# EAGLE board Bi Directional Visitor Counter (EAGLE 6.1)
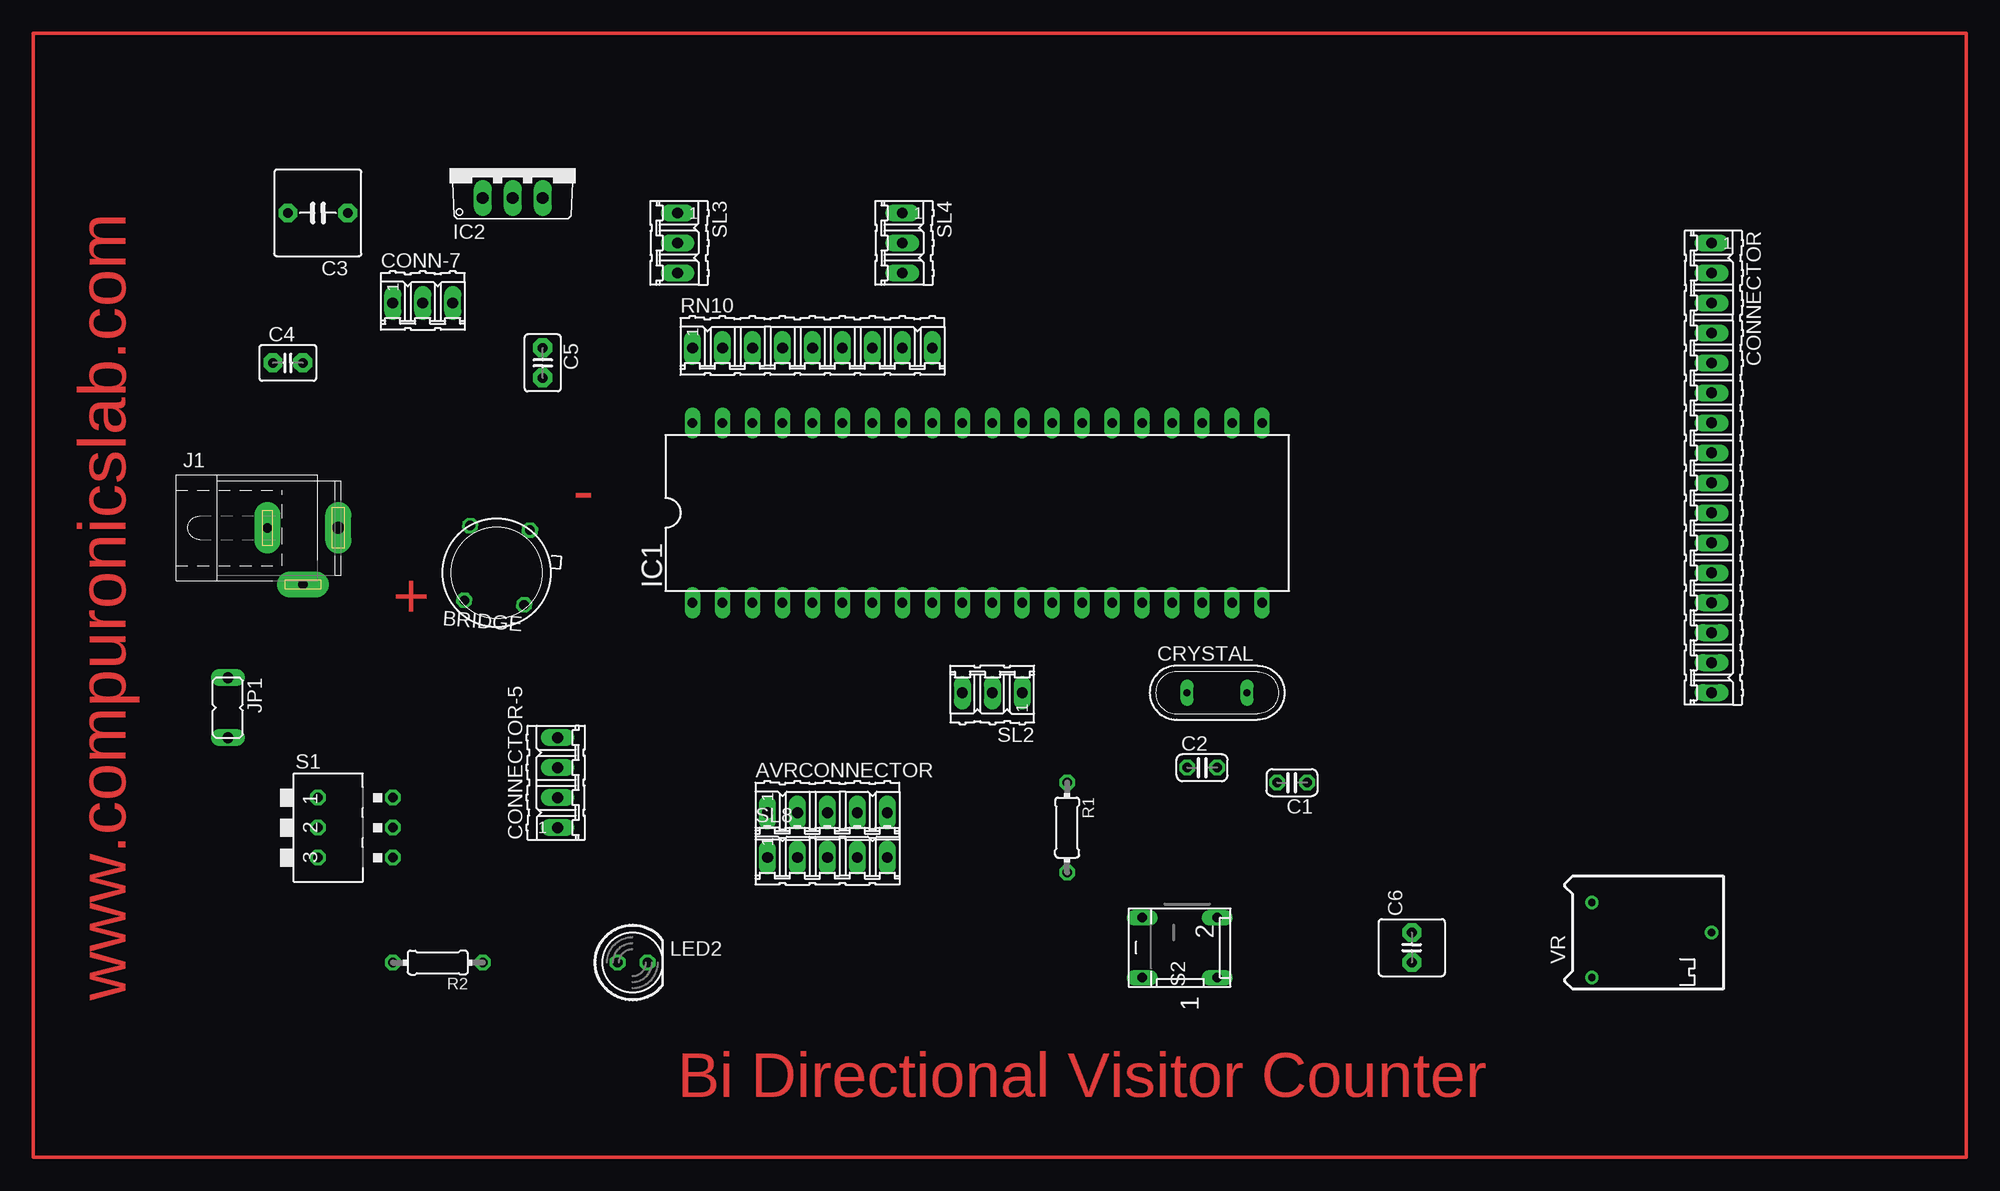
[diagram p0: board, top side]
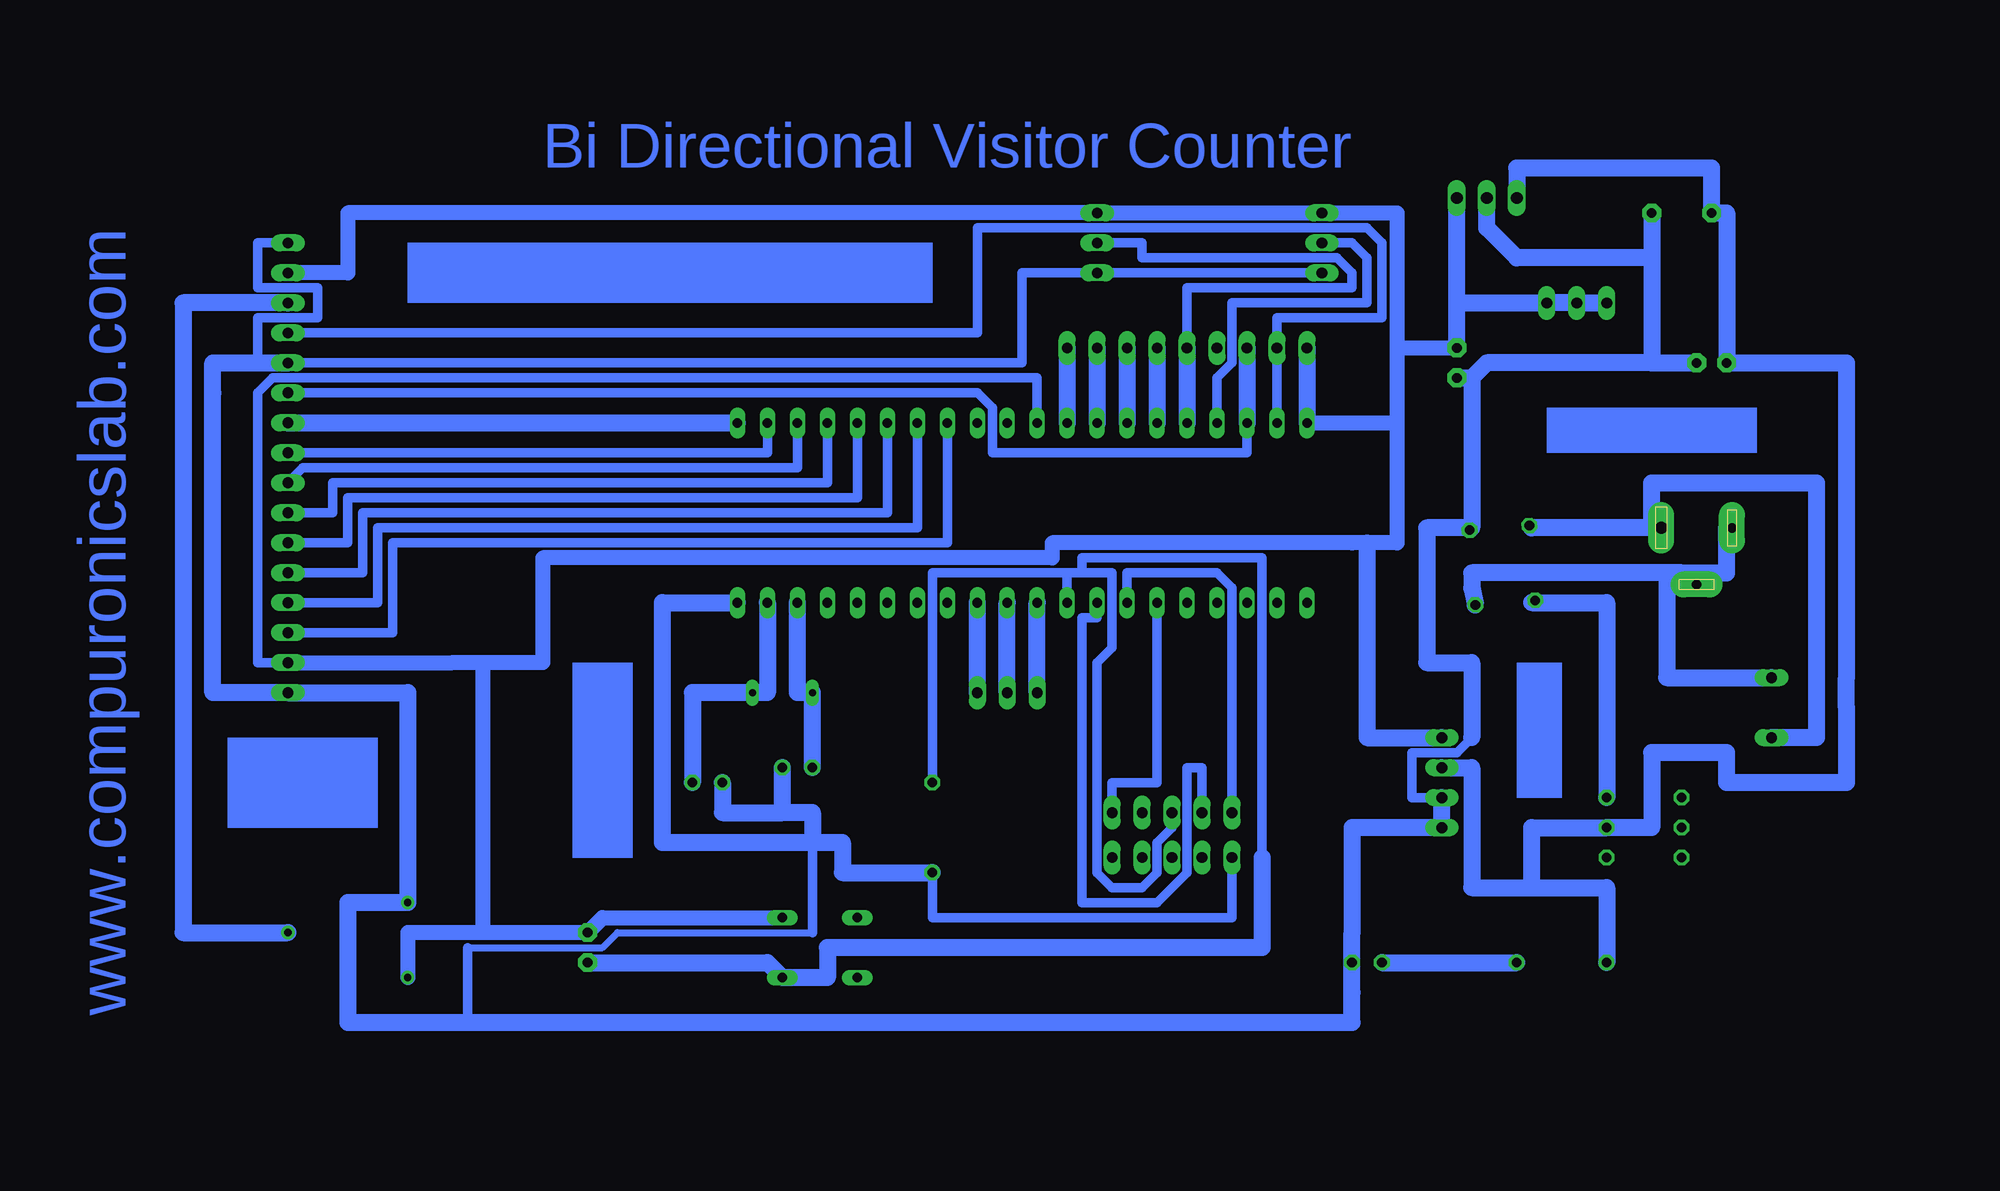
[diagram p1: board, bottom side, seen from below]

No outline drawn. Coordinates in mm, seen from the top.
Copper layers (1*16): Top 0.035mm / dielectric 1.5mm / Bottom 0.035mm
Design rules: minimum track width 20mil, minimum drill 24mil, track to track 20mil, track to pad 8mil, pad to pad 8mil, via to via 8mil, smd to smd 8mil, copper to edge 20mil, drill to drill 8mil, minimum pad ring 10mil, minimum via ring 8mil, stop-mask expansion 8mil, vias tented up to drill 0mil, thermal gap 20mil

## Footprints (pad centres in the part's own frame; a part is rotated, then mirrored left to right if it is on the bottom)
05P = drill 0.914 long: 1 -5.08,0; 2 -2.54,0; 3 0,0; 4 2.54,0; 5 5.08,0
TO39/4 = drill 0.813 octagon: 1 -2.54,-2.54; 2 2.54,-2.54; 3 2.54,3.81; 4 -2.54,3.81
C025-024X044 = drill 0.813 octagon: 1 -1.27,0; 2 1.27,0
C5B7.2 = drill 0.813 pad 1.6 octagon: 1 -2.54,0; 2 2.54,0
C2.5-3 = drill 0.813 pad 1.6 octagon: 1 -1.27,0; 2 1.27,0
C2.5-6 = drill 0.813 pad 1.6 octagon: 1 -1.27,0; 2 1.27,0
03P = drill 0.914 long: 1 -2.54,0; 2 0,0; 3 2.54,0
16P = drill 0.914 long: 1 -19.05,0; 2 -16.51,0; 3 -13.97,0; 4 -11.43,0; 5 -8.89,0; 6 -6.35,0; 7 -3.81,0; 8 -1.27,0; 9 1.27,0; 10 3.81,0; 11 6.35,0; 12 8.89,0; 13 11.43,0; 14 13.97,0; 15 16.51,0; 16 19.05,0
04P = drill 0.914 long: 1 -3.81,0; 2 -1.27,0; 3 1.27,0; 4 3.81,0
QS = drill 0.61 long: 1 -2.54,0; 2 2.54,0
DIL40 = drill 0.813 long: 1 -24.13,-7.62; 2 -21.59,-7.62; 3 -19.05,-7.62; 4 -16.51,-7.62; 5 -13.97,-7.62; 6 -11.43,-7.62; 7 -8.89,-7.62; 8 -6.35,-7.62; 9 -3.81,-7.62; 10 -1.27,-7.62; 11 1.27,-7.62; 12 3.81,-7.62; 13 6.35,-7.62; 14 8.89,-7.62; 15 11.43,-7.62; 16 13.97,-7.62; 17 16.51,-7.62; 18 19.05,-7.62; 19 21.59,-7.62; 20 24.13,-7.62; 21 24.13,7.62; 22 21.59,7.62; 23 19.05,7.62; 24 16.51,7.62; 25 13.97,7.62; 26 11.43,7.62; 27 8.89,7.62; 28 6.35,7.62; 29 3.81,7.62; 30 1.27,7.62; 31 -1.27,7.62; 32 -3.81,7.62; 33 -6.35,7.62; 34 -8.89,7.62; 35 -11.43,7.62; 36 -13.97,7.62; 37 -16.51,7.62; 38 -19.05,7.62; 39 -21.59,7.62; 40 -24.13,7.62
TO220V = drill 1.016 long: 1 -2.54,-2.54; 2 0,-2.54; 3 2.54,-2.54
SPC4077 = drill 0.8 pad 2.184 long: 1 -3,0; 2 0,-4.8 | drill 1 pad 2.184 long: 3 3,0
JP1 = drill 0.914 long: 1 0,-2.54; 2 0,2.54
LED5MM = drill 0.813 octagon: A -1.27,0; K 1.27,0
0204/7 = drill 0.813 octagon: 1 -3.81,0; 2 3.81,0
09P = drill 0.914 long: 1 -10.16,0; 2 -7.62,0; 3 -5.08,0; 4 -2.54,0; 5 0,0; 6 2.54,0; 7 5.08,0; 8 7.62,0; 9 10.16,0
DA-03 = drill 0.813 octagon: 1 -2.54,-5.08; 2 0,-5.08; 3 2.54,-5.08; 4 2.54,1.27; 5 0,1.27; 6 -2.54,1.27
DP-02 = drill 0.813 long: 1 -2.54,-2.54; 2 2.54,-2.54; 3 2.54,3.81; 4 -2.54,3.81
RTRIM64P = drill 0.61: 1 -2.54,-3.81; 2 7.62,0; 3 -2.54,2.54

## Placement (x,y rotation side)
AVRCONNECTOR  [05P]  40.64,20.32 0 top
BRIDGE  [TO39/4]  12.7,41.91 175.6 top
C1  33pf  [C025-024X044]  80.01,22.86 180 top
C2  33pf  [C025-024X044]  72.39,24.13 0 top
C3  470uf  [C5B7.2]  -2.54,71.12 180 top
C4  .01uf  [C2.5-3]  -5.08,58.42 0 top
C5  4.7uf  [C2.5-3]  16.51,58.42 270 top
C6  0.1uf  [C2.5-6]  90.17,8.89 90 top
CONN-7  3 pin  [03P]  6.35,63.5 0 top
CONNECTOR  LCD  [16P]  115.57,49.53 270 top
CONNECTOR-5  4 pin  [04P]  17.78,22.86 90 top
CRYSTAL  11.0592 mhz  [QS]  73.66,30.48 0 top
IC1  AT89S51  [DIL40]  53.34,45.72 0 top
IC2  7805TV  [TO220V]  13.97,74.93 0 top
J1  [SPC4077]  -3.81,44.45 0 top
JP1  TRANSFORMER  [JP1]  -10.16,29.21 180 top
LED2  5mm  [LED5MM]  24.13,7.62 0 top
R1  10k  [0204/7]  60.96,19.05 270 top
R2  560E  [0204/7]  7.62,7.62 180 top
RN10  10 k  [09P]  39.37,59.69 0 top
S1  ON/ OFF SWITCH  [DA-03]  2.54,19.05 270 top
S2  push switch  [DP-02]  71.12,8.89 90 top
SL2  3 pin  [03P]  54.61,30.48 180 top
SL3  ir module  [03P]  27.94,68.58 270 top
SL4  ir module  [03P]  46.99,68.58 270 top
SL8  [05P]  40.64,16.51 0 top
VR  10k  [RTRIM64P]  107.95,10.16 0 top

## Library data of the parts
AVRCONNECTOR CONN-7 CONNECTOR CONNECTOR-5 RN10 SL2-SL4 SL8 = con-amp-quick; OC_FARNELL: unknown; OC_NEWARK: unknown
BRIDGE IC2 = linear
C1 C2 = rcl
C3-C6 = capacitor-wima
CRYSTAL = special
IC1 = atmel; OC_FARNELL: unknown; OC_NEWARK: unknown
J1 = con-jack; OC_FARNELL: unknown; OC_NEWARK: unknown
JP1 = jumper
LED2 = led
R1 R2 = eagle-ltspice; SPICEMODEL: NONE; SPICEPREFIX: R
S1 = switch-dil; MPN: MCDA03; OC_FARNELL: 1521999; OC_NEWARK: 74M2972
S2 = switch-dil; MPN: MCDP02; OC_FARNELL: 1255233; OC_NEWARK: 26M1095
VR = resistor

## Nets
N$1: C2.1 CRYSTAL.1 IC1.18
N$2: C1.1 CRYSTAL.2 IC1.19
N$3: IC1.12 SL2.1
N$4: C3.2 C4.1 CONNECTOR-5.3 IC2.1 R2.2 S1.5
N$5: BRIDGE.2 J1.3 JP1.2
N$6: IC1.11 SL2.2
N$7: IC1.10 SL2.3
N$14: AVRCONNECTOR.3 C6.1 IC1.9 R1.1 S2.1
N$15: AVRCONNECTOR.1 IC1.7
N$16: BRIDGE.4 J1.1 J1.2 JP1.1
N$17: IC1.5
N$18: IC1.4
N$19: IC1.3
N$20: IC1.2
N$21: IC1.1
N$24: IC1.37 SL3.2
N$25: IC1.36 RN10.5 SL4.2
N$26: IC1.35 RN10.6
N$27: IC1.34 RN10.7
N$28: IC1.33 RN10.8
N$29: IC1.32 RN10.9
N$30: CONNECTOR.7 IC1.21
N$31: CONNECTOR.8 IC1.22
N$32: CONNECTOR.9 IC1.23
N$35: CONNECTOR.12 IC1.26
N$38: CONNECTOR.3 VR.2
N$39: C5.1 C6.2 CONN-7.1 CONN-7.2 CONN-7.3 CONNECTOR-5.4 CONNECTOR.2 CONNECTOR.15 IC1.31 IC1.40 IC2.3 RN10.1 S2.2 SL3.1 SL4.1 VR.1
N$41: BRIDGE.1 C1.2 C2.2 C3.1 C4.2 C5.2 CONNECTOR-5.1 CONNECTOR-5.2 CONNECTOR.1 CONNECTOR.5 CONNECTOR.16 IC1.20 IC2.2 LED2.K R1.2 SL3.3 SL4.3 SL8.1 VR.3
N$42: AVRCONNECTOR.5 IC1.6
N$43: LED2.A R2.1
N$45: AVRCONNECTOR.2 IC1.8
N$47: BRIDGE.3 S1.6
N$48: CONNECTOR.6 IC1.38 RN10.3
N$51: CONNECTOR.10 IC1.24
N$52: CONNECTOR.11 IC1.25
N$54: CONNECTOR.13 IC1.27
N$55: CONNECTOR.14 IC1.28
N$58: CONNECTOR.4 IC1.39 RN10.2

## Tracks (layer width: path | path; a pad name or v marks a point on that pad's centre or on a via)
N$1
  Bottom 1.422: C2.1 CRYSTAL.1 72.39,30.48 IC1.18
N$2
  Bottom 1.422: IC1.19 74.93,30.48 CRYSTAL.2 81.28,30.48 C1.1
N$3
  Bottom 1.422: SL2.1 IC1.12
N$4
  Bottom 1.422: 10.16,13.97 15.24,13.97 15.24,24.13 CONNECTOR-5.3 | 10.16,13.97 3.81,13.97 R2.2 | 10.16,13.97 10.16,19.05 S1.5 0,19.05 0,25.4 -6.35,25.4 -6.35,22.86 -16.51,22.86 -16.51,29.21 -16.51,31.75 -16.51,58.42 C4.1 -6.35,71.12 C3.2 -5.08,74.93 11.43,74.93 IC2.1
N$5
  Bottom 0.508: 10.16,44.45 BRIDGE.2 | 0,44.45 J1.3
  Bottom 1.422: 10.16,44.45 0,44.45 0,48.26 -13.97,48.26 -13.97,26.67 JP1.2
N$6
  Bottom 1.422: SL2.2 IC1.11
N$7
  Bottom 1.422: SL2.3 IC1.10
N$9
  Top 0.305: -26.67,86.36 137.16,86.36 137.16,-8.89 -26.67,-8.89 -26.67,86.36
N$14
  Bottom 0.508: 49.53,40.64 52.07,40.64
  Bottom 0.813: R1.1 60.96,40.64 52.07,40.64 48.26,40.64 | IC1.9 49.53,40.64 | AVRCONNECTOR.3 40.64,19.05 41.91,17.78 41.91,15.24 43.18,13.97 45.72,13.97 46.99,15.24 46.99,33.02 45.72,34.29 45.72,40.64 48.26,40.64 | 33.02,16.51 33.02,41.91 48.26,41.91 48.26,40.64
  Bottom 1.422: C6.1 74.93,7.62 S2.1 69.85,6.35 69.85,8.89 33.02,8.89 33.02,16.51
N$15
  Bottom 0.813: IC1.7 44.45,40.64 36.83,40.64 35.56,39.37 AVRCONNECTOR.1
N$16
  Bottom 0.508: 15.24,38.1 15.24,39.37 | -6.35,44.45 J1.1 | -3.81,40.64 -2.54,40.64 J1.2 -3.81,40.64
  Bottom 1.422: -1.27,40.64 -2.54,40.64 -6.35,40.64 -6.35,44.45 | -1.27,40.64 15.24,40.64 15.24,39.37 BRIDGE.4 | -1.27,40.64 -1.27,31.75 JP1.1
N$24
  Bottom 0.813: IC1.37 36.83,57.15 35.56,58.42 35.56,63.5 24.13,63.5 24.13,67.31 25.4,68.58 SL3.2
N$25
  Bottom 0.813: SL4.2 43.18,68.58 43.18,67.31 26.67,67.31 25.4,66.04 25.4,64.77 39.37,64.77 RN10.5
  Bottom 1.422: RN10.5 IC1.36
N$26
  Bottom 1.422: RN10.6 IC1.35
N$27
  Bottom 1.422: RN10.7 IC1.34
N$28
  Bottom 1.422: RN10.8 IC1.33
N$29
  Bottom 1.422: RN10.9 IC1.32
N$30
  Bottom 1.422: CONNECTOR.7 IC1.21
N$31
  Bottom 0.813: IC1.22 74.93,50.8 CONNECTOR.8
N$32
  Bottom 0.813: IC1.23 72.39,49.53 114.3,49.53 CONNECTOR.9
N$35
  Bottom 0.813: IC1.26 64.77,45.72 109.22,45.72 109.22,40.64 CONNECTOR.12
N$38
  Bottom 1.422: VR.2 124.46,10.16 124.46,63.5 CONNECTOR.3
N$39
  Bottom 0.508: 101.6,33.02 99.06,33.02 | 25.4,43.18 24.13,43.18
  Bottom 0.813: IC1.31 52.07,57.15 116.84,57.15 118.11,55.88 118.11,33.02 CONNECTOR.15
  Bottom 1.27: VR.1 105.41,10.16 102.87,10.16 99.06,10.16 | 99.06,10.16 C6.2 88.9,11.43 S2.2 | 99.06,33.02 99.06,10.16 | CONNECTOR.15 101.6,33.02 93.98,33.02 93.98,41.91 50.8,41.91 50.8,43.18 25.4,43.18 21.59,43.18 21.59,48.26 21.59,53.34 | IC1.40 21.59,53.34 | CONNECTOR.2 110.49,66.04 110.49,71.12 SL4.1 SL3.1 21.59,71.12 21.59,59.69 | 21.59,59.69 21.59,53.34 | 21.59,59.69 C5.1
  Bottom 1.422: CONN-7.1 CONN-7.2 CONN-7.3 16.51,63.5 | C5.1 16.51,63.5 | 16.51,63.5 IC2.3 | RN10.1 IC1.40 | 24.13,43.18 24.13,26.67 CONNECTOR-5.4
N$41
  Bottom 0.508: 25.4,10.16 LED2.K 25.4,5.08 | 15.24,44.45 BRIDGE.1 | 71.12,17.78 68.58,17.78
  Bottom 0.61: 71.12,10.16 87.63,10.16 88.9,8.89 100.33,8.89
  Bottom 0.813: CONNECTOR-5.2 20.32,21.59 20.32,25.4 16.51,25.4 15.24,26.67 | SL8.1 35.56,11.43 60.96,11.43 R1.2 | SL3.3 SL4.3 53.34,66.04 53.34,58.42 CONNECTOR.5 | CONNECTOR.1 118.11,68.58 118.11,64.77 113.03,64.77 113.03,62.23 118.11,62.23 118.11,58.42 | 71.12,10.16 71.12,17.78 | 100.33,2.54 100.33,8.89
  Bottom 1.422: CONNECTOR-5.2 CONNECTOR-5.1 25.4,19.05 25.4,10.16 25.4,5.08 25.4,2.54 100.33,2.54 110.49,2.54 110.49,12.7 VR.3 105.41,30.48 CONNECTOR.16 121.92,30.48 121.92,55.88 121.92,58.42 118.11,58.42 CONNECTOR.5 | 15.24,57.15 15.24,44.45 19.05,44.45 19.05,33.02 15.24,33.02 15.24,26.67 | C5.2 15.24,57.15 | IC2.2 13.97,69.85 11.43,67.31 0,67.31 | C3.1 0,67.31 | 0,58.42 C4.2 | 0,67.31 0,58.42 | 15.24,57.15 13.97,58.42 0,58.42 | R1.2 68.58,15.24 68.58,17.78 83.82,17.78 83.82,38.1 IC1.20 | C1.2 78.74,20.32 73.66,20.32 | 71.12,17.78 71.12,20.32 73.66,20.32 | C2.2 73.66,22.86 73.66,20.32
N$42
  Bottom 0.813: IC1.6 41.91,22.86 45.72,22.86 AVRCONNECTOR.5
N$43
  Bottom 1.422: LED2.A R2.1
N$45
  Bottom 0.813: IC1.8 46.99,36.83 48.26,36.83 48.26,12.7 41.91,12.7 39.37,15.24 39.37,24.13 38.1,24.13 AVRCONNECTOR.2
N$47
  Bottom 0.508: 10.16,38.1 BRIDGE.3
  Bottom 1.422: S1.6 3.81,38.1 10.16,38.1
N$48
  Bottom 0.813: CONNECTOR.6 57.15,55.88 55.88,54.61 55.88,50.8 34.29,50.8 IC1.38
  Bottom 1.422: RN10.3 IC1.38
N$51
  Bottom 0.813: IC1.24 69.85,48.26 111.76,48.26 111.76,45.72 CONNECTOR.10
N$52
  Bottom 0.813: IC1.25 67.31,46.99 110.49,46.99 110.49,43.18 CONNECTOR.11
N$54
  Bottom 0.813: IC1.27 62.23,44.45 107.95,44.45 107.95,38.1 CONNECTOR.13
N$55
  Bottom 0.813: IC1.28 59.69,43.18 106.68,43.18 106.68,35.56 CONNECTOR.14
N$58
  Bottom 0.813: IC1.39 RN10.2 31.75,62.23 22.86,62.23 22.86,68.58 24.13,69.85 57.15,69.85 57.15,60.96 CONNECTOR.4
(copper drawn outside any net)
  shapes: Bottom area x5

## Text on the board
Top: www.compuronicslab.com | - | + | Bi Directional Visitor Counter
Bottom: Bi Directional Visitor Counter | www.compuronicslab.com